# EAGLE board 20190105_ORIGAMI_V1-V (EAGLE 9.2.0)
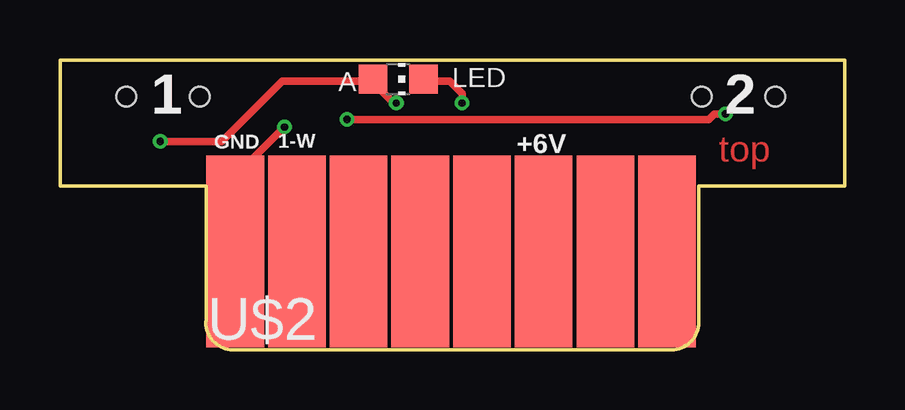
[diagram p0: board, top side]
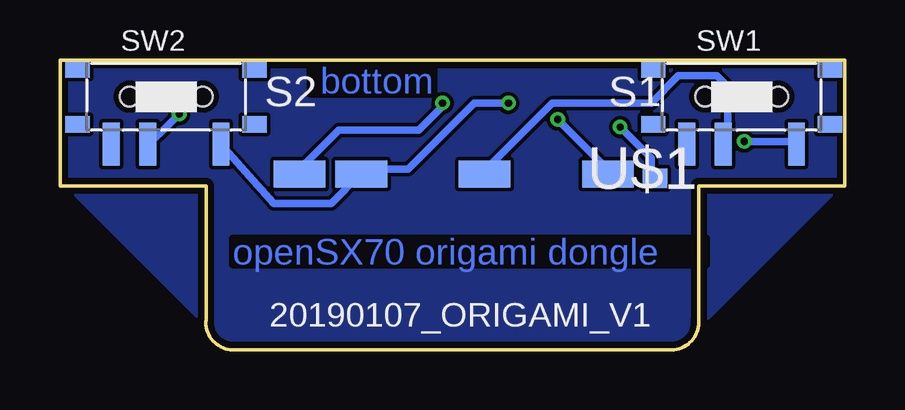
[diagram p1: board, bottom side, seen from below]

Size 32.69 x 12.09 mm. Coordinates in mm from the lower left corner, seen from the top.
Outline: 26.63,6.71 26.61,6.83
Outline: 26.61,6.83 26.61,1.24 arc-90 25.59,0 7.1,0 arc-90 6.08,1.24 6.08,6.83 0,6.83 0,12.09 32.69,12.09 32.69,6.83 26.61,6.83
Copper layers (1*16): Top 0.035mm / dielectric 1.5mm / Bottom 0.035mm
Design rules "SeeedStudio_2layer_DRU_no_angle_20140221": minimum track width 6mil, minimum drill 12mil, track to track 6mil, track to pad 6mil, pad to pad 6mil, via to via 6mil, smd to smd 0mil, copper to edge 10mil, drill to drill 10mil, minimum pad ring 10mil, minimum via ring 6mil, stop-mask expansion 2mil, vias tented up to drill 100mil, thermal gap 10mil
Net classes: 0 GND: width 0.305 mm; 1 VCC: width 0.254 mm; 2 2.8V: width 0.254 mm

## Footprints (pad centres in the part's own frame; a part is rotated, then mirrored left to right if it is on the bottom)
CHIP-LED0805 = smd 1.2 x 1.2: A 0,-1.05; C 0,1.05
SW7-SMD-L6.7X2.7X3.2MM = smd 1.8 x 0.7: A 1.978,2.286; B 1.978,-2.286; COM 1.978,-0.762 | smd 0.7 x 1.016: SS1 -1.15,-3.683; SS2 1.15,-3.683; SS3 1.15,3.683; SS4 -1.15,3.683 | hole 0.813: 0,-1.524; 0,1.524
FLASH-8-BRIDGE-SW1-SW2-LED-SMALL = smd 1.016 x 0.8: GND -8.39,5.138 | smd 2.159 x 1.143: LED 6.42,4.96; SWITCH-1 -1.29,4.96; SWITCH-2 -6.43,4.96; VCC-2.8V 3.85,4.96
SX70-FLASH-EDGE8-2 = smd 2.4 x 8: FLASH-1 8.99,7.5; FLASH-2 6.42,7.5; FLASH-3 1.28,7.5; FLASH-4 -1.29,7.5; FLASH-5 -3.86,7.5; GND -9,7.5; S2 -6.43,7.5; VCC-6V 3.85,7.5

## Placement (x,y rotation side)
LED  [CHIP-LED0805]  14.09,11.29 270 top
SW1  MK-12C02 G1.5  [SW7-SMD-L6.7X2.7X3.2MM]  4.29,10.55 270 bottom
SW2  MK-12C02 G1.5  [SW7-SMD-L6.7X2.7X3.2MM]  28.27,10.55 270 bottom
U$1  FLASH-BRIDGE-SW1-SW2-LED-SMALL  [FLASH-8-BRIDGE-SW1-SW2-LED-SMALL]  16.29,12.29 180 bottom
U$2  SX70-FLASH-EDGE8-MALE-LONG  [SX70-FLASH-EDGE8-2]  16.3,-3.4 0 top

## Library data of the parts
LED = led
SW1 SW2 = Seeed-Switch; MPN: MK-12C02 G1.5
U$1 U$2 = _openSX70

## Nets
2.8V-V: LED.A SW1.A SW2.A U$1.VCC-2.8V
N$1: U$1.GND U$2.GND
N$2: SW1.COM U$1.SWITCH-1
N$3: SW2.COM U$1.SWITCH-2
N$4: LED.C U$1.LED

## Tracks (layer width: path | path; a pad name or v marks a point on that pad's centre or on a via)
2.8V-V  (via drill 0.3)
  Top 0.305: v14.01,10.29 13.91,10.29 13.26,10.93 LED.A 12.87,11.2 9.25,11.2 6.74,8.69 v4.18,8.69
  Bottom 0.305: v14.01,10.29 15.44,10.29 18.18,7.54 19.95,7.54 U$1.VCC-2.8V 20.18,7.32 21.4,6.1 23.8,6.1 SW2.A | v4.18,8.69 2.17,8.69 SW1.A
GND
  pour Bottom: -0.01,12.19 -0.01,6.99 6.99,-0.01 25.19,-0.01 25.39,-0.21 32.39,6.79 32.79,6.79 32.79,12.19 32.69,12.29 0.09,12.29
N$1  (via drill 0.3)
  Top 0.305: v9.35,9.29 7.38,7.32 7.38,4.11 U$2.GND
  Bottom 0.305: v9.35,9.29 8.07,8 8.07,7.32 U$1.GND
N$2
  Bottom 0.305: SW1.COM 4.87,8.65 4.87,10.97 5.32,11.43 6.92,11.43 8.07,10.29 12.18,10.29 14.92,7.54 U$1.SWITCH-1
N$3  (via drill 0.3)
  Top 0.305: v27.73,9.83 27.27,9.83 27.04,9.6 v11.95,9.6
  Bottom 0.305: v27.73,9.83 28.52,9.04 SW2.COM | v11.95,9.6 9.89,7.54 U$1.SWITCH-2
N$4  (via drill 0.3)
  Top 0.305: v16.75,10.29 16.75,10.69 16.24,11.2 15.15,11.2 LED.C
  Bottom 0.305: v16.75,10.29 16.8,10.24 16.8,10.12 17.75,9.16 21.08,9.16 22.7,7.54 U$1.LED

## Text on the board
Top: top
Bottom: bottom | openSX70 origami dongle
tPlace: +6V | +
bPlace: 20190107_ORIGAMI_V1
tNames: A | 1 | 2 | GND | 1-W
bNames: S1 | S2